# Altium PCB motor_pcb.PcbDoc
Units mil, origin at the board's own origin, x right, y up, seen from the top; angles counter-clockwise.
Board outline 1375 x 1580 mil, 2 copper layers (Top Layer, Bottom Layer); 40 components, 30 nets, 138 pads, 28 vias.
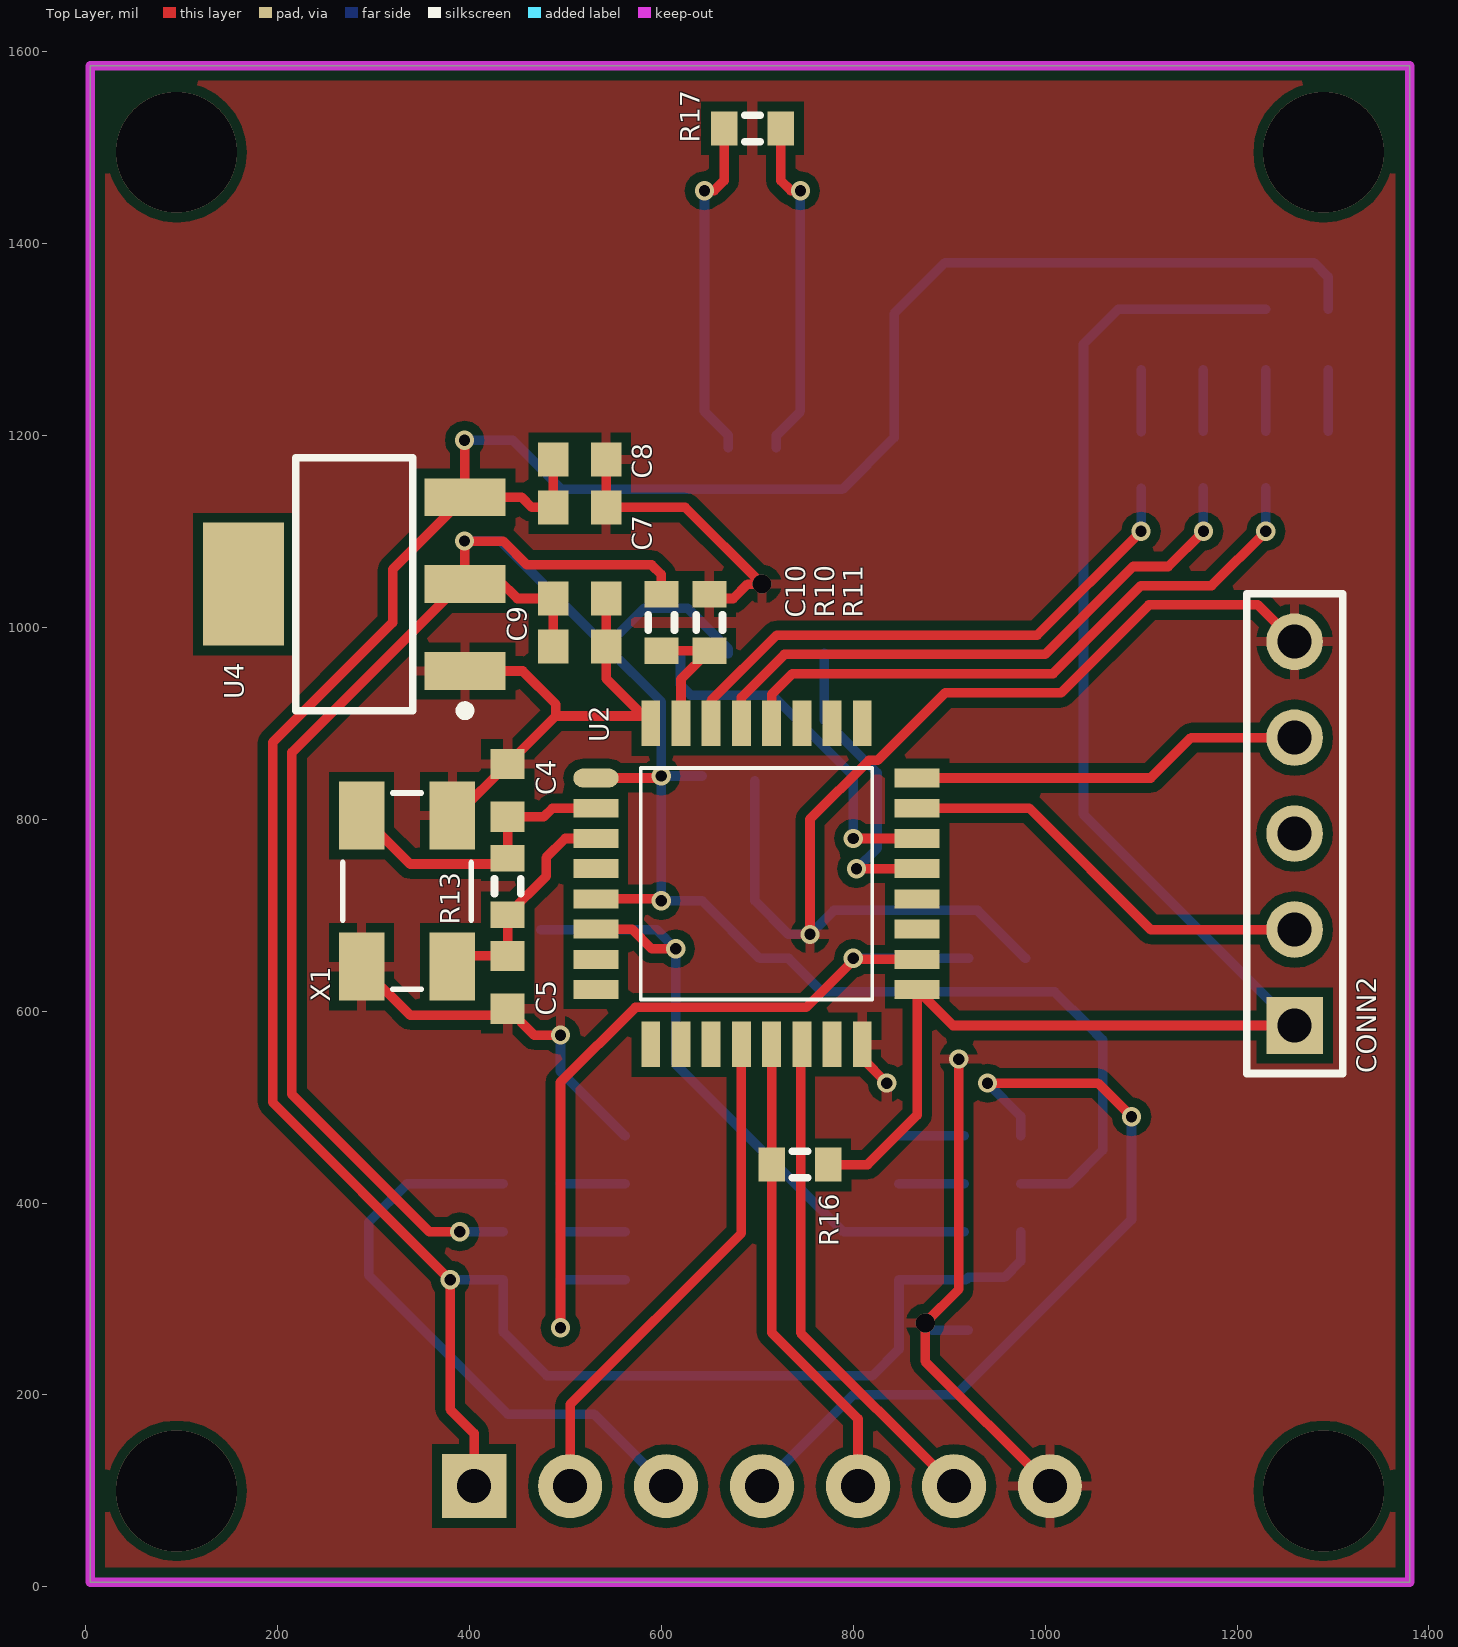
[diagram p0: Top Layer view]
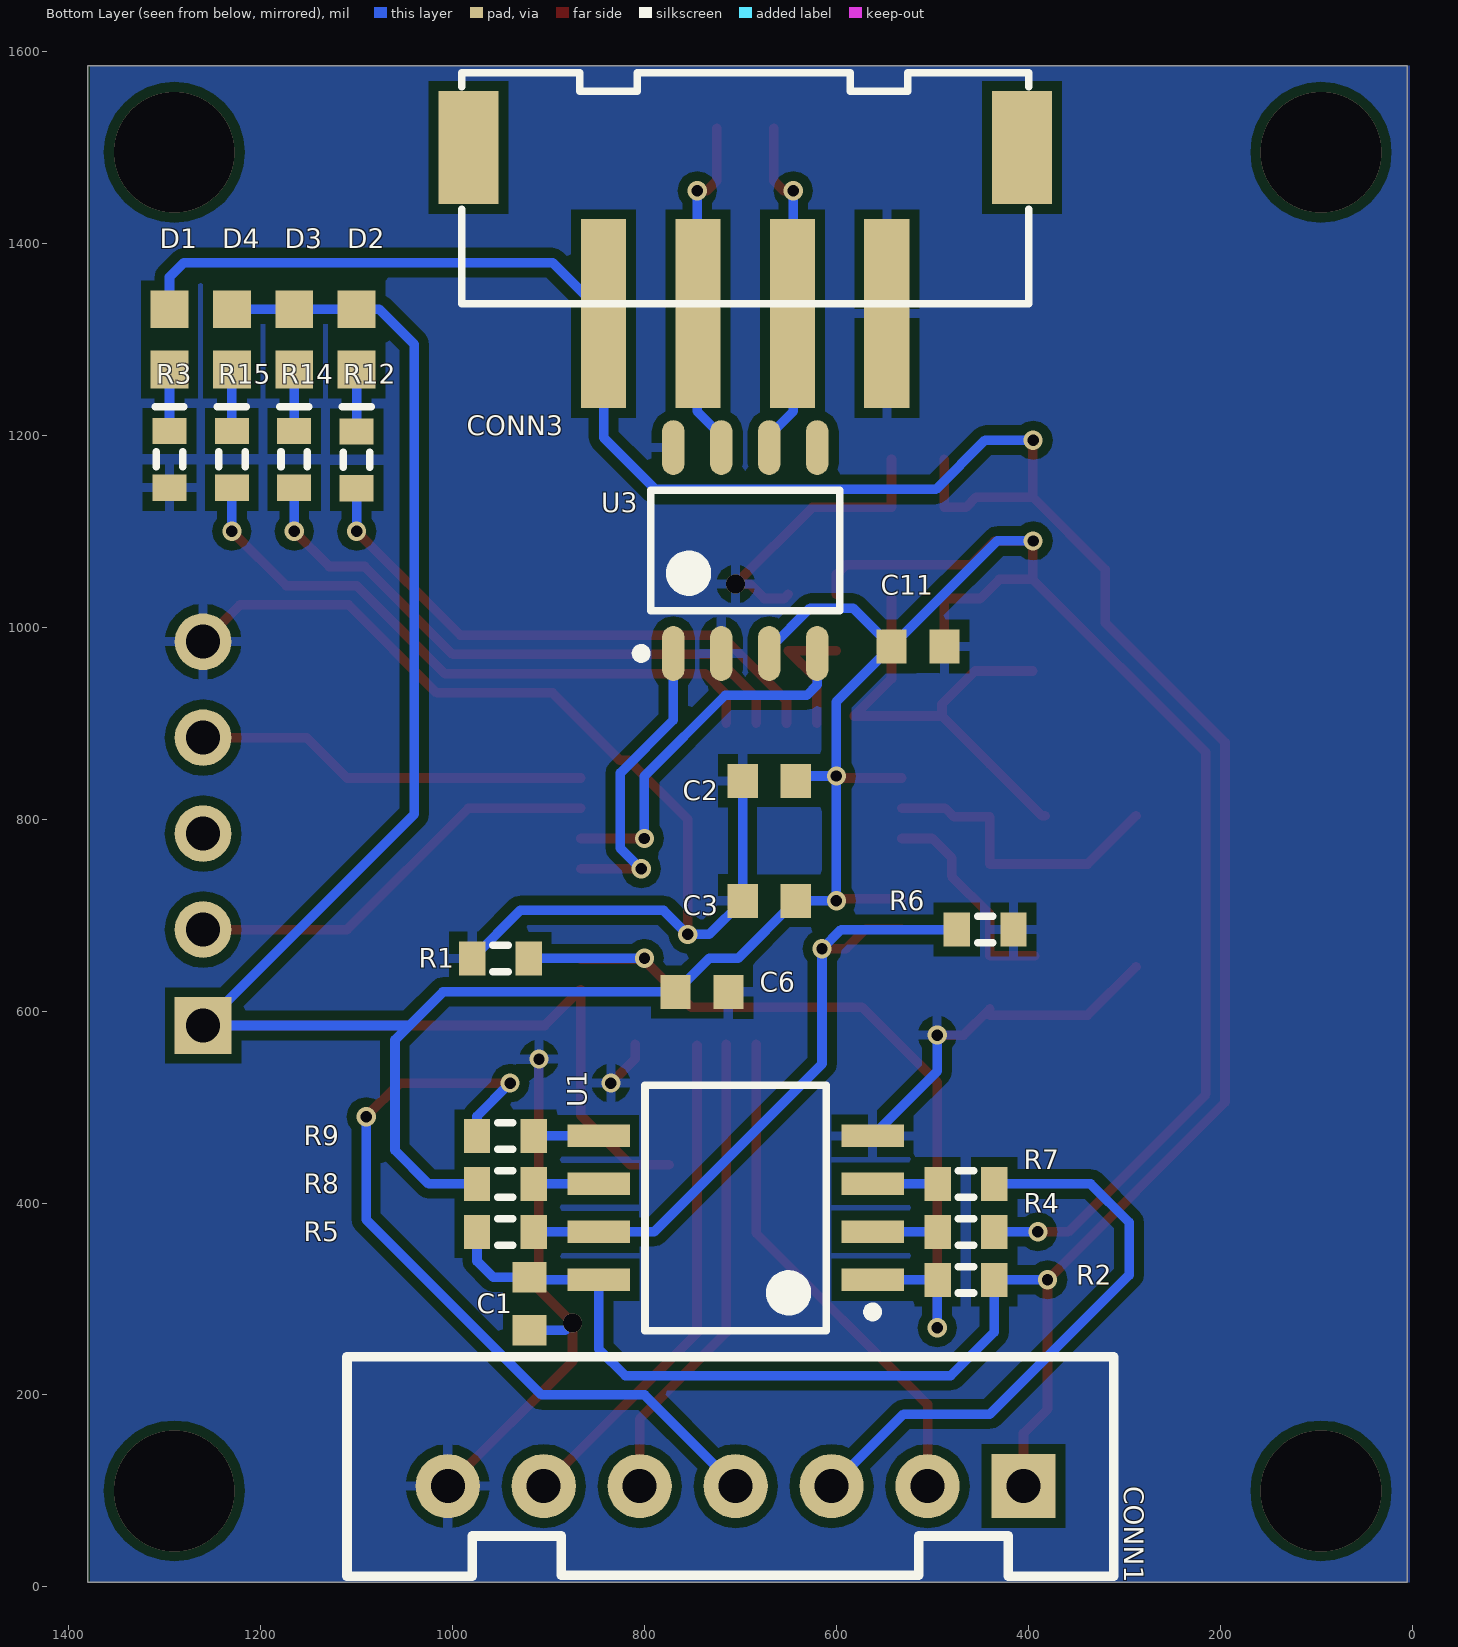
[diagram p1: Bottom Layer view, seen from below]

## Layer stack, top to bottom
Top Solder: solder mask 0.4, Solder Resist, Dk 3.5
Top Layer: signal copper 1.4
Dielectric 1: dielectric 12.6, FR-4, Dk 4.8
Bottom Layer: signal copper 1.4
Bottom Solder: solder mask 0.4, Solder Resist, Dk 3.5

## Board outline
5,5 1380,5 1380,1585 5,1585

## Design rules (kind name [scope] priority, off if disabled: settings)
Clearance [All] p1: gap=10 ignorepadtopadclearanceinfootprint=FALSE except(0: Arc-Hole Track-Hole SMDPad-Hole THPad-Hole Via-Hole Fill-Hole Poly-Hole Region-Hole Text-Hole)
MinimumSolderMaskSliver [All] p1: minsoldermaskwidth=2
PolygonConnect [All] p1: connectstyle=Relief reliefconductorwidth=10 reliefentries=4 polygonreliefangle="90 Angle" airgapwidth=10
RoutingVias [All] p1: holewidth=28 width=50 viastyle="Through Hole" minholewidth=28 minwidth=50 maxholewidth=28 maxwidth=50
SilkToSilkClearance [All] p1: silktosilkclearance=2
SolderMaskExpansion [All] p1: expansion=4
Width [All] p1: maxlimit=10 minlimit=10 preferedwidth=10
28 further rules are at their usual default settings.

## Components (designator, comment, footprint, x,y, rotation, side; value= is the part's Value field where it differs from the comment)
C1 "Cap Semi" 1608[0603] 920,295 r270 bottom value=100pF
C2 "Cap Semi" 1608[0603] 670,840 r180 bottom value=100pF
C3 "Cap Semi" 1608[0603] 670,715 r180 bottom value=100pF
C4 "Cap Semi" 1608[0603] 440,830 r270 top value=100pF
C5 "Cap Semi" 1608[0603] 440,630 r90 top value=100pF
C6 "Cap Semi" 1608[0603] 740,620 r180 bottom value=100pF
C7 "Cap Semi" 1608[0603] 515,1125 r180 top value=10uF
C8 "Cap Semi" 1608[0603] 515,1175 r180 top value=0.1uF
C9 "Cap Semi" 1608[0603] 515,980 r180 top value=0.1uF
C10 "Cap Semi" 1608[0603] 515,1030 r180 top value=10uF
C11 "Cap Semi" 1608[0603] 515,980 r0 bottom value=0.1uF
CONN1 "XH7" XH2.54-LI-7P 705,105 r0 bottom
CONN2 "" HDR1X5 1260,585 r90 top
CONN3 "" XH2.54-LS-4P 695,1460 r180 bottom
D1 "Green" LED603N 1295,1300 r90 bottom value="2.1v 20mA"
D2 "Blue" LED603N 1100,1300 r90 bottom
D3 "Blue" LED603N 1165,1300 r90 bottom
D4 "Blue" LED603N 1230,1300 r90 bottom
R1 "Res3" J1-0603 950,655 r180 bottom value=1K
R2 "Res3" J1-0603 465,320 r0 bottom value=1K
R3 "Res3" J1-0603 1295,1175 r90 bottom value=330R
R4 "Res3" J1-0603 465,370 r0 bottom value=1K
R5 "Res3" J1-0603 945,370 r180 bottom value=1K
R6 "Res3" J1-0603 445,685 r0 bottom value=1K
R7 "Res3" J1-0603 465,420 r0 bottom value=1K
R8 "Res3" J1-0603 945,420 r0 bottom value=1K
R9 "Res3" J1-0603 945,470 r0 bottom value=1K
R10 "Res3" J1-0603 600,1005 r90 top value=10K
R11 "Res3" J1-0603 650,1005 r90 top value=1K
R12 "Res3" J1-0603 1100,1174.53 r270 bottom value=1K
R13 "Res3" J1-0603 440,730 r90 top value=1K
R14 "Res3" J1-0603 1165,1175 r270 bottom value=1K
R15 "Res3" J1-0603 1230,1175 r270 bottom value=1K
R16 "Res3" J1-0603 744.53,440 r0 top value=100R
R17 "Res3" J1-0603 695,1520 r180 top value=120R
U1 "LM393DR" LM393DR 705,395 r0 bottom
U2 "STM32F042K6T6" "STM32 32 PIN" 531.93,842.91 r270 top
U3 "SN65HVD230DR" SN65HVD230 695,1080 r90 bottom
U4 "AMS1117" SOT230P700X180-4N 280,1045 r180 top
X1 "8MHz" "XTAL ACT530SMX-4 Series" 335,725 r90 top

## Footprints (in the part's own frame and the unit in brackets; to place one, negate y for a bottom-side part, rotate by r counter-clockwise, add the part's x,y. Pads: shape width x height; smd on the part's side, far side on the other; paste and mask are expansions set on the pad)
1608[0603] [mm] "Chip Capacitor, Body 1.6x0.8mm, IPC High Density"
  rect 0.8x0.9 smd: 1(-0.7,0) 2(0.7,0)
  body extent -0.87,-0.48 0.87,0.48, height 1.3
HDR1X5 [mm] "Connector; Header; 5 Position"
  rect 1.5x1.5 hole 0.9: 1(0,0)
  round 1.5 hole 0.9: 2(2.54,0) 3(5.08,0) 4(7.62,0) 5(10.16,0)
  silkscreen extent -1.27,-1.27 11.43,1.27
J1-0603 [mm] "Chip Resistor, Body 1.6x0.8mm, IPC High Density"
  rect 0.7x0.9 smd: 1(-0.75,0) 2(0.75,0)
  silkscreen extent -0.2,-0.35 0.2,0.35, body extent -0.85,-0.48 0.85,0.48, height 0.9
LED603N [mm] "Chip LED, Body 1.6x0.8mm, IPC Medium Density"
  rect 1x1 smd: 1(-0.8,0) 2(0.8,0)
  silkscreen extent -1.78,-0.38 -1.78,0.38, body extent -0.82,-0.38 0.82,0.34, height 0.68
LM393DR [mm] "SOIC, 8-Leads, Body 6.20x5.30mm, Pitch 1.27mm, IPC Medium Density"
  rect 1.65x0.6 smd: 1(-3.625,1.905) 2(-3.625,0.635) 3(-3.625,-0.635) 4(-3.625,-1.905) 5(3.625,-1.905) 6(3.625,-0.635) 7(3.625,0.635) 8(3.625,1.905)
  silkscreen extent -3.75,-3.25 2.4,3.25, body extent -2.8,-3.25 2.8,3.25, height 2
SN65HVD230 [mm] "SOIC, 8-Leads, Body 4.91x3.90mm, Pitch 1.27mm, IPC Medium Density"
  oval 1.45x0.6 smd: 1(-2.725,1.905) 2(-2.725,0.635) 3(-2.725,-0.635) 4(-2.725,-1.905) 5(2.725,-1.905) 6(2.725,-0.635) 7(2.725,0.635) 8(2.725,1.905)
  silkscreen extent -2.85,-2.5 1.6,2.88, body extent -2,-2.5 2,2.5, height 1.75
SOT230P700X180-4N [mm] "SOT223, 4-Leads, Body 6.51x7.00mm (avg), Pitch 2.30mm, IPC Medium Density"
  rect 2.15x1 smd: 1(-2.93,2.3) 2(-2.93,0) 3(-2.93,-2.3)
  rect 2.15x3.25 smd: 4(2.93,0)
  silkscreen extent -3.06,-3.35 1.55,3.47, body extent -1.86,-3.35 1.86,3.35, height 1.8
"STM32 32 PIN" [mm]
  oval 0.5x1.2 smd: 1(0,0)
  rect 0.5x1.2 smd: 2(0.8,0) 3(1.6,0) 4(2.4,0) 5(3.2,0) 6(4,0) 7(4.8,0) 8(5.6,0) 17(5.6,8.5) 18(4.8,8.5) 19(4,8.5) 20(3.2,8.5) 21(2.4,8.5) 22(1.6,8.5) 23(0.8,8.5) 24(0,8.5)
  rect 1.2x0.5 smd: 9(7.05,1.45) 10(7.05,2.25) 11(7.05,3.05) 12(7.05,3.85) 13(7.05,4.65) 14(7.05,5.45) 15(7.05,6.25) 16(7.05,7.05) 25(-1.45,7.05) 26(-1.45,6.25) 27(-1.45,5.45) 28(-1.45,4.65) 29(-1.45,3.85) 30(-1.45,3.05) 31(-1.45,2.25) 32(-1.45,1.45)
  silkscreen extent -0.27,1.18 5.87,7.32
XH2.54-LI-7P [mm] "接插件，7P"
  rect 1.7x1.7 hole 0.9: 1(-7.62,0)
  round 1.7 hole 0.9: 2(-5.08,0) 3(-2.54,0) 4(0,0) 5(2.54,0) 6(5.08,0) 7(7.62,0)
  silkscreen extent -10.01,-3.43 10.29,2.39, body extent -10.12,-3.3 10.12,2.4, height 7.05
XH2.54-LS-4P [mm] "长：15mm，宽：6mm，高：8.3mm"
  rect 1.6x3 smd: 0(-7.326,1.016) 0(7.326,1.016)
  rect 1.2x5 smd: 1(-3.75,-3.383) 2(-1.25,-3.383) 3(1.25,-3.383) 4(3.75,-3.383)
  silkscreen extent -7.5,-3.13 7.5,3, body extent -7.5,-6 7.5,3, height 8
"XTAL ACT530SMX-4 Series" [mm] "ACT530SMX-4Series from ACT"
  rect 1.8x1.2 smd: 1(-2,-1.2) 2(2,-1.2) 3(2,1.2) 4(-2,1.2)
  silkscreen extent -2.6,-1.7 2.6,1.7, body extent -2.5,-1.6 2.5,1.6, height 1

## Part data
C1 C2 C3 C4 C5 C6 C7 C8 C9 C10 C11: "Capacitor (Semiconductor SIM Model)", LatestRevisionDate=29-May-2009, LatestRevisionNote="IPC-7351 Footprint Added.", PackageDescription="Chip Capacitor", PackageReference=C1206, Published=8-Jun-2000, Publisher="Altium Limited"
CONN1: "JST-SH 5-pin Side Entry Socket", Manufacturer="Generic Components", Supplier Part Number 1=455-1804-1-ND, Class=Connector, Supplier 1=Digi-Key
CONN2: library part "Hdr 5 Pin 0.1"
CONN3: library part JST-4, "JST-SH 4-pin Side Entry Socket", Manufacturer="Generic Components", Supplier Part Number 1=455-1804-1-ND, Class=Connector, Supplier 1=Digi-Key
D1: library part "LED 603 Gr", "Green 603 LED", Supplier Part Number 1=754-1116-1-ND, Supplier 1=Digi-Key
D2 D3 D4: library part "LED 603 Bl", "Blue 603 LED", Supplier Part Number 1=350-2037-1-ND, Supplier 1=Digi-Key
R1 R2 R3 R4 R5 R6 R7 R8 R9 R10 R11 R12 R13 R14 R15 R16 R17: "Resistor", LatestRevisionDate=29-May-2009, LatestRevisionNote="IPC-7351 Footprint Added.", PackageDescription="Chip Resistor", PackageReference=J1-0603, Published=8-Jun-2000, Publisher="Altium Limited"
X1: library part "XTAL ACT530SMX-4", "Surface Mount Quartz Crystal, Digikey 535-9720-1-ND", Supplier Part Number 1=535-9720-1-ND, Class=Oscillator, SubClass="Crystal Oscillator", Supplier 1=Digi-Key

## Via types
v1: diameter 20, hole 11.81, Top Layer to Bottom Layer, 22 vias
v2: diameter 125.98, hole 125.98, Top Layer to Bottom Layer, 4 vias
v3: diameter 20, hole 20, Top Layer to Bottom Layer, 2 vias

## Nets (pads, with @x,y where several pads share a name; then routed paths per layer and width w, separated by ;. In a path a pad name is that pad's centre, name@x,y a point inside that pad or via, vN(x,y) a via of type N, cw(c..) or ccw(c..) an arc to the next point about the centre after c; other vN are vias at no path point)
3V3: C2.2 C3.2 C6.1 C9.2 C10.2 C11.2 CONN2.1 D2.2 D3.2 D4.2 R4.1 R8.2 R10.2 R16.2 U2.1 U2.5 U2.17 U3.3 U4.2 | length 4751.1
  Top Layer w10: v1(390,370) 358.28,370 215,513.28 215,869.65 U4.2@395.35,1050 ; C9.2 C10.2 450,1030 430,1050 U4.2@395.35,1050 ; U2.5 v1@598.07,716.93 ; U2.1 v1@597.91,842.91 ; R10.2 600,1055 590,1065 460,1065 435.35,1089.65 395.35,1089.65 U4.2@395.35,1050 ; R16.2 815,440 866.57,491.57 U2.17 904.02,585 CONN2.1
  Bottom Layer w10: v1(390,370) R4.1 ; v1(395,1090) 432.56,1090 C11.2 ; C2.2@642.44,845 v1(600,845) ; U3.3 670,977.37 627.37,1020 582.56,1020 C11.2 ; R8.2 1025,420 1060,455 1060,570 1045,585 ; D2.2 1076.5,1331.5 1040,1295 1040,805 CONN2.1 1045,585 ; D2.2@1102.41,1331.5 D3.2 D4.2 ; C11.2 600,922.56 v1(600,845) ; v1(600,845) v1(600,715) C3.2 702.44,655 732.56,655 C6.1 1010,620 1045,585
5V: C1.1 C7.2 C8.2 CONN1.1 CONN3.1 D1.2 R2.1 R5.1 U1.8 U4.3 | length 3335.8
  Top Layer w10: v1@395.35,1199.65 U4.3 ; CONN1.1 405,160 380,185 v1(380,320) 195,505 195,880 320,1005 320,1060.2 U4.3 ; C8.2 C7.2 465,1125 454.45,1135.55 U4.3
  Bottom Layer w10: v1(380,320) R2.1 435.47,265.47 480.94,220 820,220 847.72,247.72 U1.8 917.44,320 C1.1 957.56,322.56 974.53,339.53 R5.1 ; v1(395,1195) 445,1195 496.26,1143.74 788.74,1143.74 842.64,1197.64 CONN3.1 895.83,1380 1280,1380 1295,1365 D1.2
CAN_IN: U2.21 U3.1 | length 319
  Top Layer w10: v1(803.43,748.43) U2.21
  Bottom Layer w10: U3.1 770,903.28 825.08,848.21 825.08,769.57 v1@803.94,748.43
CAN_OUT: U2.22 U3.4 | length 383.7
  Top Layer w10: v1(800.08,779.92) U2.22
  Bottom Layer w10: U3.4 620,940 630.83,929.17 715.83,929.17 800.08,844.92 v1(800.08,779.92)
CANH: CONN3.2 R17.1 U3.7 | length 357.4
  Top Layer w10: R17.1 724.53,1465.47 735,1455 v1(745,1455)
  Bottom Layer w10: U3.7 720,1200 745,1225 v1(745,1455)
CANL: CONN3.3 R17.2 U3.6 | length 357.4
  Top Layer w10: v1(645,1455) 655,1455 665.47,1465.47 R17.2
  Bottom Layer w10: v1(645,1455) 645,1225 670,1200 U3.6
GND: C1.2 C2.1 C3.1 C4.1 C5.1 C6.2 C7.1 C8.1 C9.1 C10.1 C11.1 CONN1.7 CONN2.5 CONN3.4 R1.1 R3.1 R6.1 R11.2 U1.4 U2.16 U2.32 U3.2 U3.8 U4.1 X1.2 X1.4 | length 2988.1
  Top Layer w10: X1.4 338.19,595.83 440,595.83 C5.1 467.44,575 v1(495,575) ; X1.2 386.18,803.74 C4.1 490,907.56 ; U4.1 455.55,954.45 490,920 490,907.56 ; C10.1 C9.1 542.56,946.46 581.46,907.56 490,907.56 ; C8.1 C7.1 625,1125 v3(705,1045) 690,1045 675,1030 654.53,1030 R11.2 ; v1(755,680) 755,800 816.38,861.38 825.54,861.38 895.86,931.69 1016.55,931.69 1108.21,1023.36 1221.64,1023.36 CONN2.5 ; U2.16 809.49,550.51 v1(835,525) ; v1(910,550) 910,310 v3(875,275) 875,235 CONN1.7
  Bottom Layer w10: v1(495,575) 495,537.28 U1.4 ; C2.1 C3.1 732.56,680 v1(755,680) 780,705 929.53,705 R1.1 ; v3(875,275) 882.56,267.44 C1.2
LED_CAN: R12.2 U2.30 | length 589.6
  Top Layer w10: U2.30 652.01,923.58 720.12,991.69 991.69,991.69 v1(1100,1100)
  Bottom Layer w10: v1(1100,1100) R12.2
LED_SIG_A: R14.2 U2.29 | length 625.5
  Top Layer w10: U2.29 683.5,926.79 728.41,971.69 999.98,971.69 1091.64,1063.36 1128.36,1063.36 v1(1165,1100)
  Bottom Layer w10: v1(1165,1100) R14.2
LED_SIG_B: R15.2 U2.28 | length 660.9
  Top Layer w10: U2.28 715,930 736.69,951.69 1008.26,951.69 1099.93,1043.36 1173.36,1043.36 v1(1230,1100)
  Bottom Layer w10: v1(1230,1100) R15.2
NetC4_2: C4.2 R13.2 U2.2 X1.3 | length 317.9
  Top Layer w10: X1.3 338.19,753.31 440,753.31 R13.2 C4.2 477.44,802.44 486.42,811.42 U2.2
NetC5_2: C5.2 R13.1 U2.3 X1.1 | length 225.6
  Top Layer w10: X1.1@393.55,657.56 C5.2 R13.1 480,740.47 480,760 499.92,779.92 U2.3
NetCONN1_2: CONN1.2 U2.12 | length 534.3
  Top Layer w10: CONN1.2 505,190 683.5,368.5 U2.12
NetCONN1_3: CONN1.3 R7.1 | length 613.2
  Bottom Layer w10: R7.1 335,420 295,380 295,325 440,180 530,180 CONN1.3
NetCONN1_4: CONN1.4 R9.2 | length 841.1
  Top Layer w10: v1(940,525) 1055,525 v1(1090,490)
  Bottom Layer w10: CONN1.4 800,200 907.24,200 1090,382.76 v1(1090,490) ; v1(940,525) 974.53,490.47 R9.2
NetCONN1_5: CONN1.5 R16.1 U2.13 | length 497.6
  Top Layer w10: U2.13 R16.1 715,265 805,175 CONN1.5
NetCONN1_6: CONN1.6 U2.14 | length 525.3
  Top Layer w10: U2.14@745.28,564.13 745.28,264.72 CONN1.6
NetD1_1: D1.1 R3.2 | length 64
  Bottom Layer w10: R3.2 D1.1
NetD2_1: D2.1 R12.1 | length 64.4
  Bottom Layer w10: R12.1 D2.1
NetD3_1: D3.1 R14.1 | length 64
  Bottom Layer w10: R14.1 D3.1
NetD4_1: D4.1 R15.1 | length 64
  Bottom Layer w10: R15.1 D4.1
NetR1_2: R1.2 R2.2 U1.1 U2.18 | length 918.3
  Top Layer w10: v1(495,270) 495,526.02 572.96,603.98 751.1,603.98 801.06,653.94 U2.18
  Bottom Layer w10: R2.2 U1.1 ; v1(495,270) R2.2@495,319.53 ; v1(800,655) R1.2
NetR4_2: R4.2 U1.2 | length 67.8
  Bottom Layer w10: R4.2 U1.2
NetR5_2: R5.2 R6.2 U1.7 U2.6 | length 733.3
  Top Layer w10: U2.6 569.57,685.43 590,665 v1(615,665)
  Bottom Layer w10: R6.2 595,685 v1(615,665) 615,545 790,370 U1.7 R5.2
NetR7_2: R7.2 U1.3 | length 67.8
  Bottom Layer w10: R7.2 U1.3
NetR8_1: R8.1 U1.6 | length 67.8
  Bottom Layer w10: U1.6 R8.1
NetR9_1: R9.1 U1.5 | length 67.8
  Bottom Layer w10: U1.5 R9.1
NetR10_1: R10.1 R11.1 U2.31 | length 137.7
  Top Layer w10: R10.1 R11.1 620.51,945.98 U2.31
Sclk: CONN2.4 U2.24 | length 410.9
  Top Layer w10: U2.24 1110,842.91 1152.09,885 CONN2.4
SWD: CONN2.2 U2.23 | length 445.8
  Top Layer w10: U2.23 983.58,811.42 1110,685 CONN2.2
pads on no net: CONN2.3 CONN3.0 U2.4 U2.7 U2.8 U2.9 U2.10 U2.11 U2.15 U2.19 U2.20 U2.25 U2.26 U2.27 U3.5 U4.4
copper on no net:
  other v2: 95,100 1290,100 95,1495 1290,1495

## Polygon pours and split planes (outlines as drawn)
GND on Top Layer "GND_L01_P004" (solid, pour order 4): 0,0 1375,0 1375,1580 0,1580
GND on Bottom Layer "GND_L02_P005" (solid, pour order 5): 2.5,5 1377.5,5 1377.5,1585 2.5,1585

## Keep-outs
Top Layer:
  the board outline again, w10